# EAGLE board canbus_shield-v12 (EAGLE 7.2.0)

Size 53.34 x 59.69 mm. Coordinates in mm from the lower left corner, seen from the top.
Outline: 0,2.54 0,55.88 1.27,57.15 12.7,57.15 15.24,59.69 48.26,59.69 50.8,57.15 53.34,57.15 53.34,2.54 50.8,0 2.54,0 0,2.54
Copper layers (1*16): Top 0.035mm / dielectric 1.5mm / Bottom 0.035mm
Design rules "SparkFun": minimum track width 8mil, minimum drill 20mil, track to track 8mil, track to pad 8mil, pad to pad 8mil, via to via 8mil, smd to smd 8mil, copper to edge 8mil, drill to drill 8mil, minimum pad ring 12mil, minimum via ring 10mil, stop-mask expansion 4mil, vias tented up to drill 20mil, thermal gap 10mil

## Footprints (pad centres in the part's own frame; a part is rotated, then mirrored left to right if it is on the bottom)
0603-CAP = smd 1.1 x 1: 1 -0.85,0; 2 0.85,0
FIDUCIAL-1X2 = smd 1 x 1: 1 0,0
1X04 = drill 1.016 pad 1.88 square: 1 0,0 | drill 1.016 pad 1.88: 2 2.54,0; 3 5.08,0; 4 7.62,0
CRYSTAL-SMD-5X3 = smd 1.9 x 1.1: 1 -1.85,-1.15; 2 1.85,-1.15; 3 1.85,1.15; 4 -1.85,1.15
0603-RES = smd 1.1 x 1: 1 -0.85,0; 2 0.85,0
TACTILE_SWITCH_SMD = smd 1.524 x 0.762: 1 -2.54,1.905; 2 2.54,1.905; 3 -2.54,-1.905; 4 2.54,-1.905
SO-18W = smd 0.762 x 1.143: 1 -5.08,-4.788; 2 -3.81,-4.788; 3 -2.54,-4.788; 4 -1.27,-4.788; 5 0,-4.788; 6 1.27,-4.788; 7 2.54,-4.788; 8 3.81,-4.788; 9 5.08,-4.788; 10 5.08,4.788; 11 3.81,4.788; 12 2.54,4.788; 13 1.27,4.788; 14 0,4.788; 15 -1.27,4.788; 16 -2.54,4.788; 17 -3.81,4.788; 18 -5.08,4.788
SO-08M = smd 0.6 x 2.2: 1 -1.905,-3.33; 2 -0.635,-3.33; 3 0.635,-3.33; 4 1.905,-3.33; 5 1.905,3.33; 6 0.635,3.33; 7 -0.635,3.33; 8 -1.905,3.33

## Placement (x,y rotation side)
C1  0.1uF  [0603-CAP]  26.67,29.21 90 top
C2  560pF  [0603-CAP]  24.13,33.02 90 top
C3  560pF  [0603-CAP]  22.86,33.02 90 top
C5  22pF  [0603-CAP]  6.35,25.4 180 top
C6  0.1uF  [0603-CAP]  15.24,33.02 270 top
C7  22pF  [0603-CAP]  6.35,17.78 180 top
JP2  FIDUCIAL1X2  [FIDUCIAL-1X2]  2.54,2.54 0 top
JP3  FIDUCIAL1X2  [FIDUCIAL-1X2]  46.99,53.34 0 top
JP5  DNP  [1X04]  39.37,34.29 270 top
Q1  16MHz  [CRYSTAL-SMD-5X3]  6.35,21.59 270 top
R10  100  [0603-RES]  24.13,36.83 90 top
R12  100  [0603-RES]  22.86,36.83 90 top
R13  4.7k  [0603-RES]  15.24,36.83 90 top
S2  RESET  [TACTILE_SWITCH_SMD]  30.48,22.86 0 top
U4  MCP2515  [SO-18W]  19.05,25.4 270 top
U5  MCP2551  [SO-08M]  10.16,39.37 0 top
U$1  CREATIVE_COMMONS  [CREATIVE_COMMONS]  20.32,-11.43 0 top  (outside the outline)

## Library data of the parts
C1-C3 C5-C7 JP2 JP3 JP5 Q1 R10 R12 R13 S2 U$1 = SparkFun
U4 = microchip_can
U5 = skpang_lib

## Nets
CAN_CS: U4.16
CAN_INT: U4.12
CAN_RXD: U4.2 U5.4
CAN_TXD: U4.1 U5.1
CANH: JP5.3 R12.2 U5.7
CANL: JP5.4 R10.2 U5.6
GND: C1.1 C2.1 C3.1 C5.1 C6.1 C7.1 JP5.2 R13.1 S2.1 U4.9 U5.2
MISO: U4.15
MOSI: U4.14
N$9: C2.2 R10.1
N$10: C3.2 R12.1
N$14: R13.2 U5.5 U5.8
N$17: C7.2 Q1.3 U4.8
N$18: C5.2 Q1.1 U4.7
RS: S2.3 U4.17
SCK: U4.13
VCC: C1.2 C6.2 JP5.1 U4.18 U5.3

## Tracks (layer width: path | path; a pad name or v marks a point on that pad's centre or on a via)
CAN_RXD  (1 unrouted)
CAN_TXD  (1 unrouted)
CANH  (2 unrouted)
CANL  (2 unrouted)
GND  (10 unrouted)
N$9  (1 unrouted)
N$10  (1 unrouted)
N$14  (2 unrouted)
N$17  (2 unrouted)
N$18  (2 unrouted)
RS  (1 unrouted)
VCC  (4 unrouted)

## Text on the board
Bottom: www.skpang.co.uk | 8/31/10
tPlace: 5V | CAN-BUS Shield | D8 | D7 | PWR | GND | CAN | H | CAN | L | Reset
tNames: RESET
tValues: Sukking Pang and Ryan Owens